# Altium PCB Led.PcbDoc
Units mm, origin at the board's own origin, x right, y up, seen from the top; angles counter-clockwise.
Board outline 86 x 86 mm, 2 copper layers (Top Layer, Bottom Layer); 38 components, 41 nets, 90 pads, 0 vias.
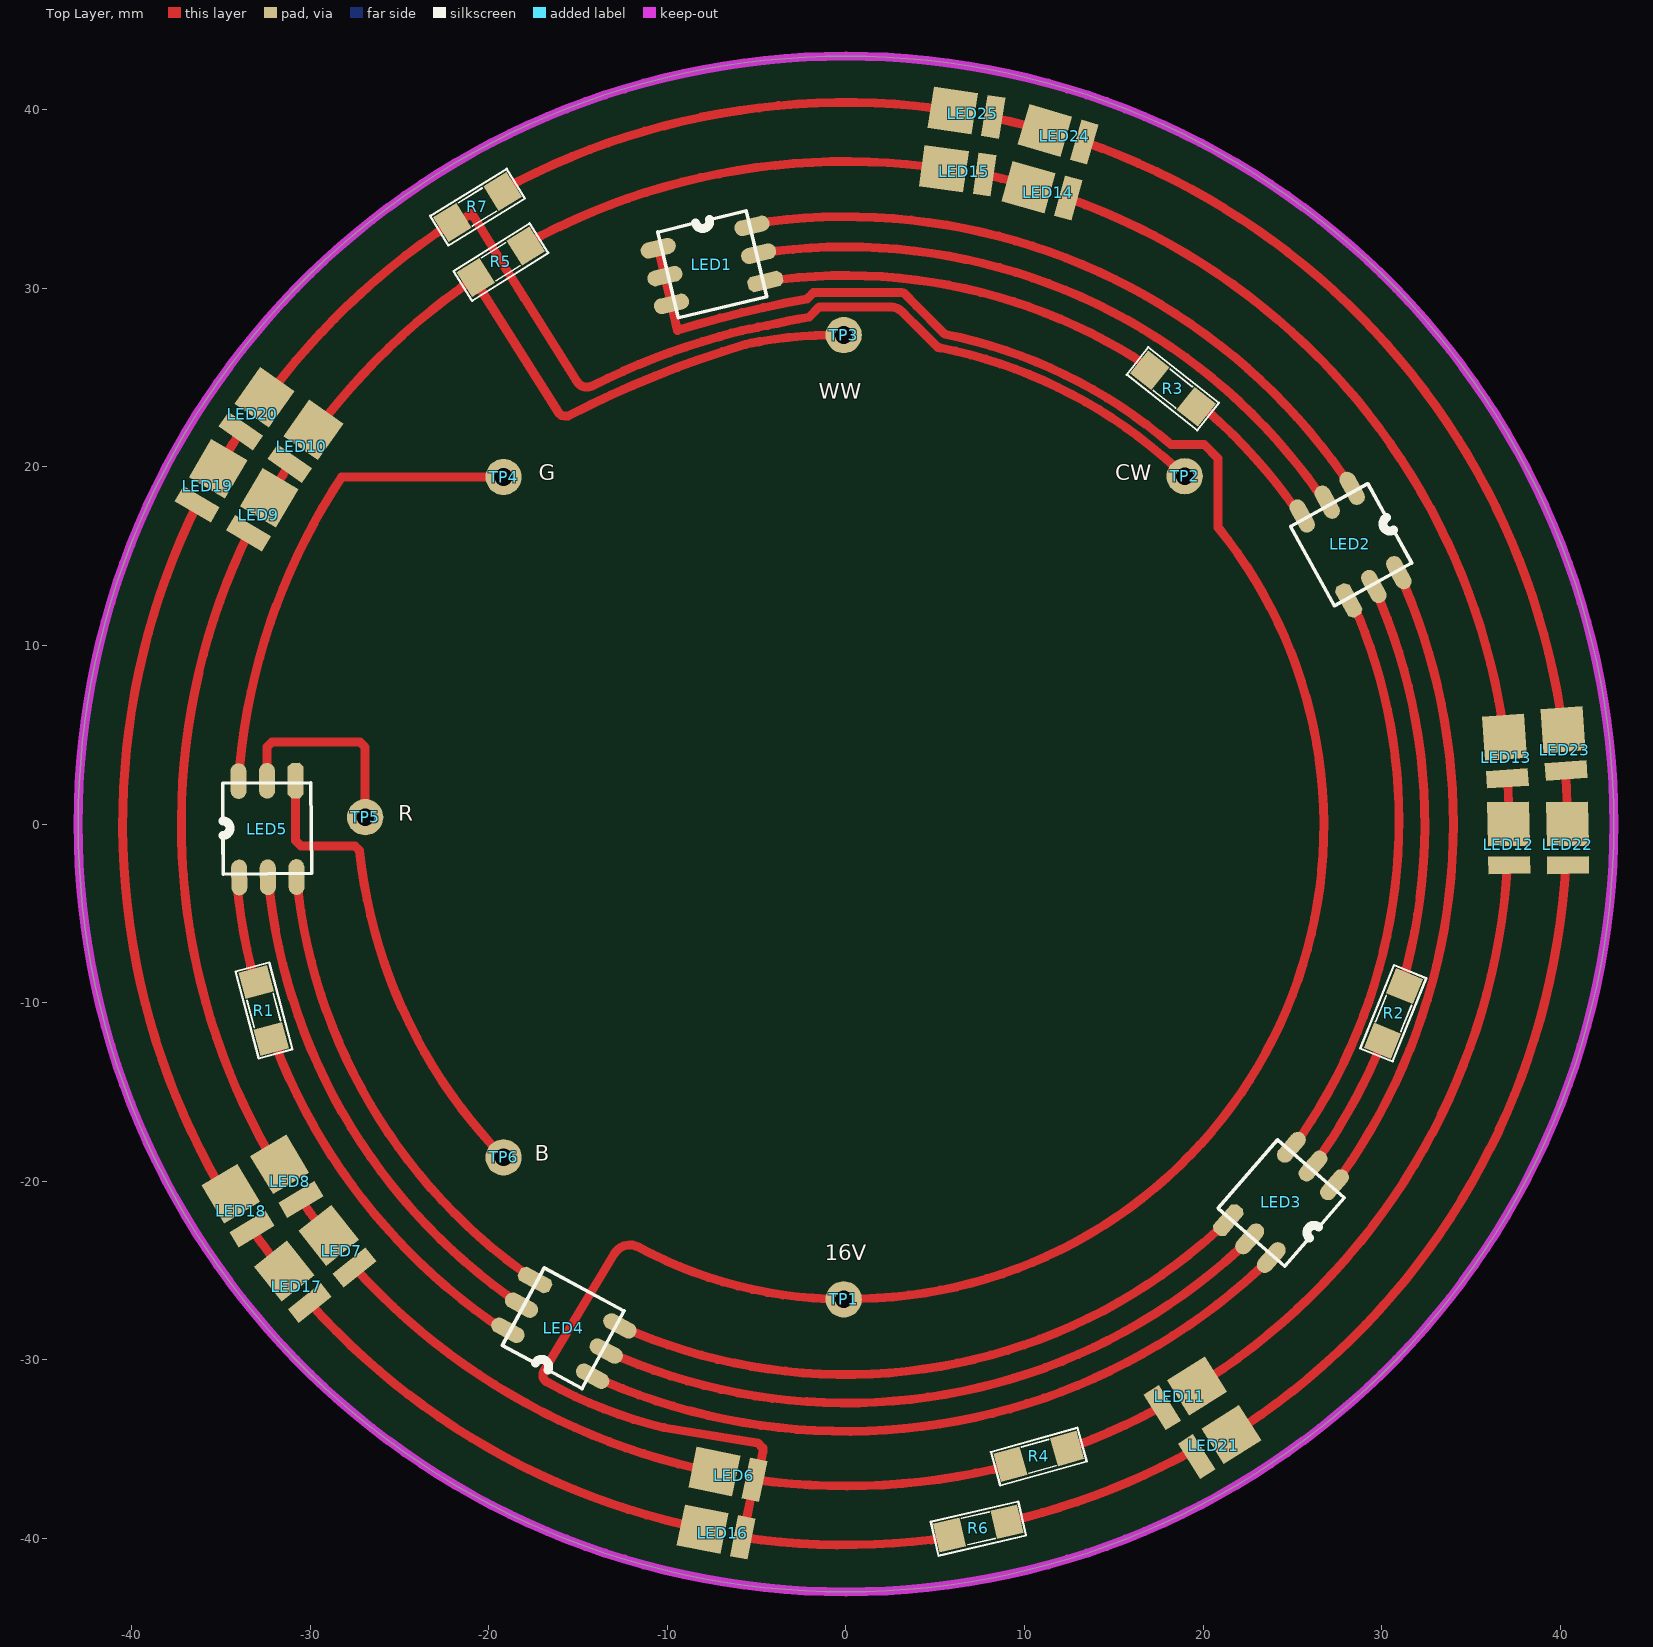
[diagram p0: Top Layer view]
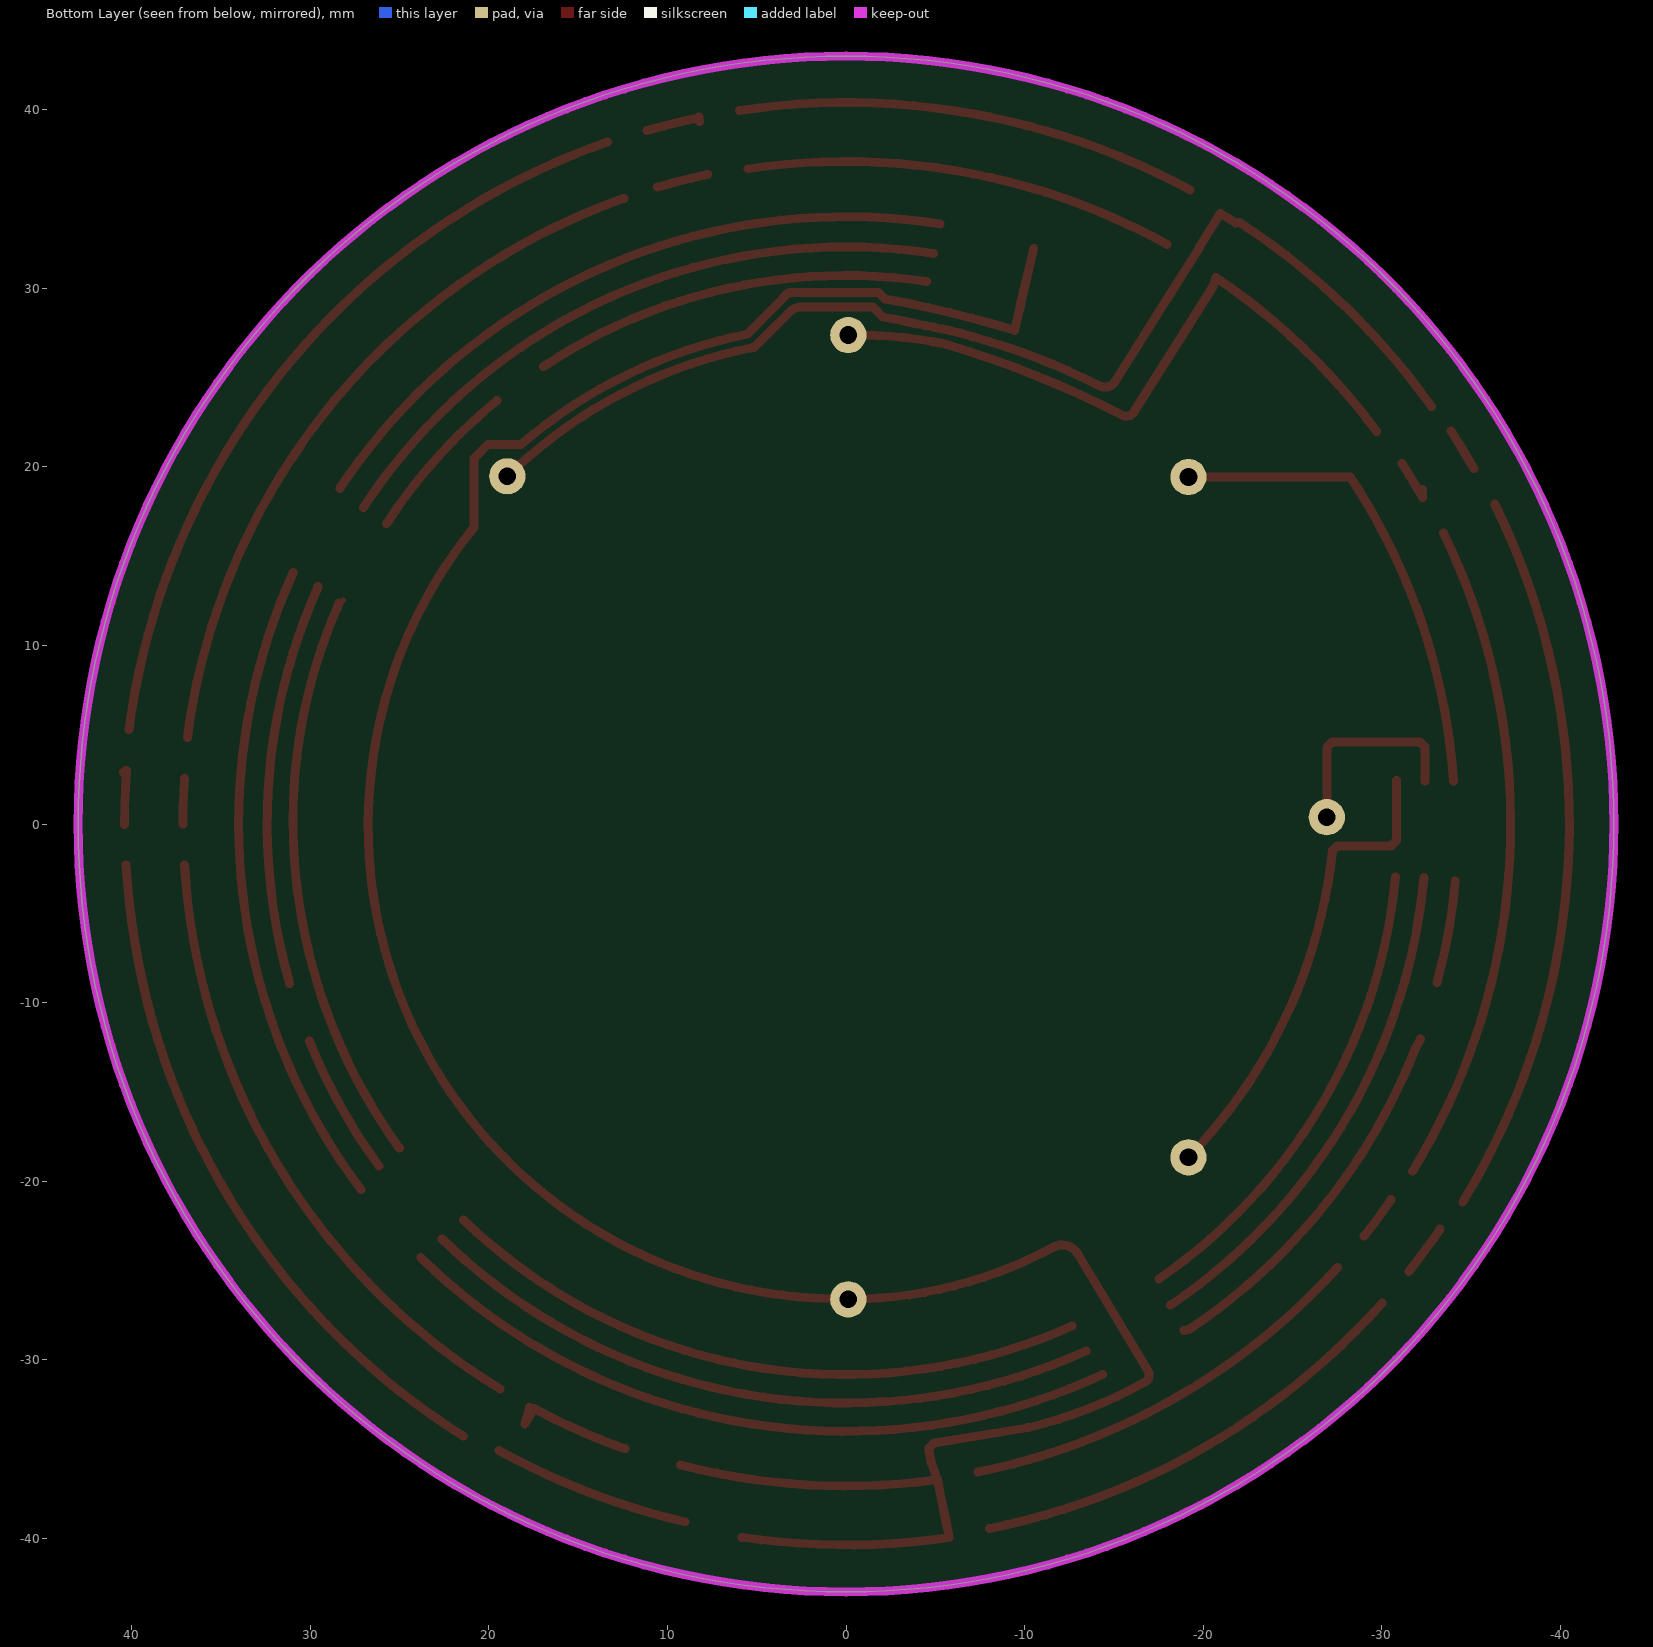
[diagram p1: Bottom Layer view, seen from below]
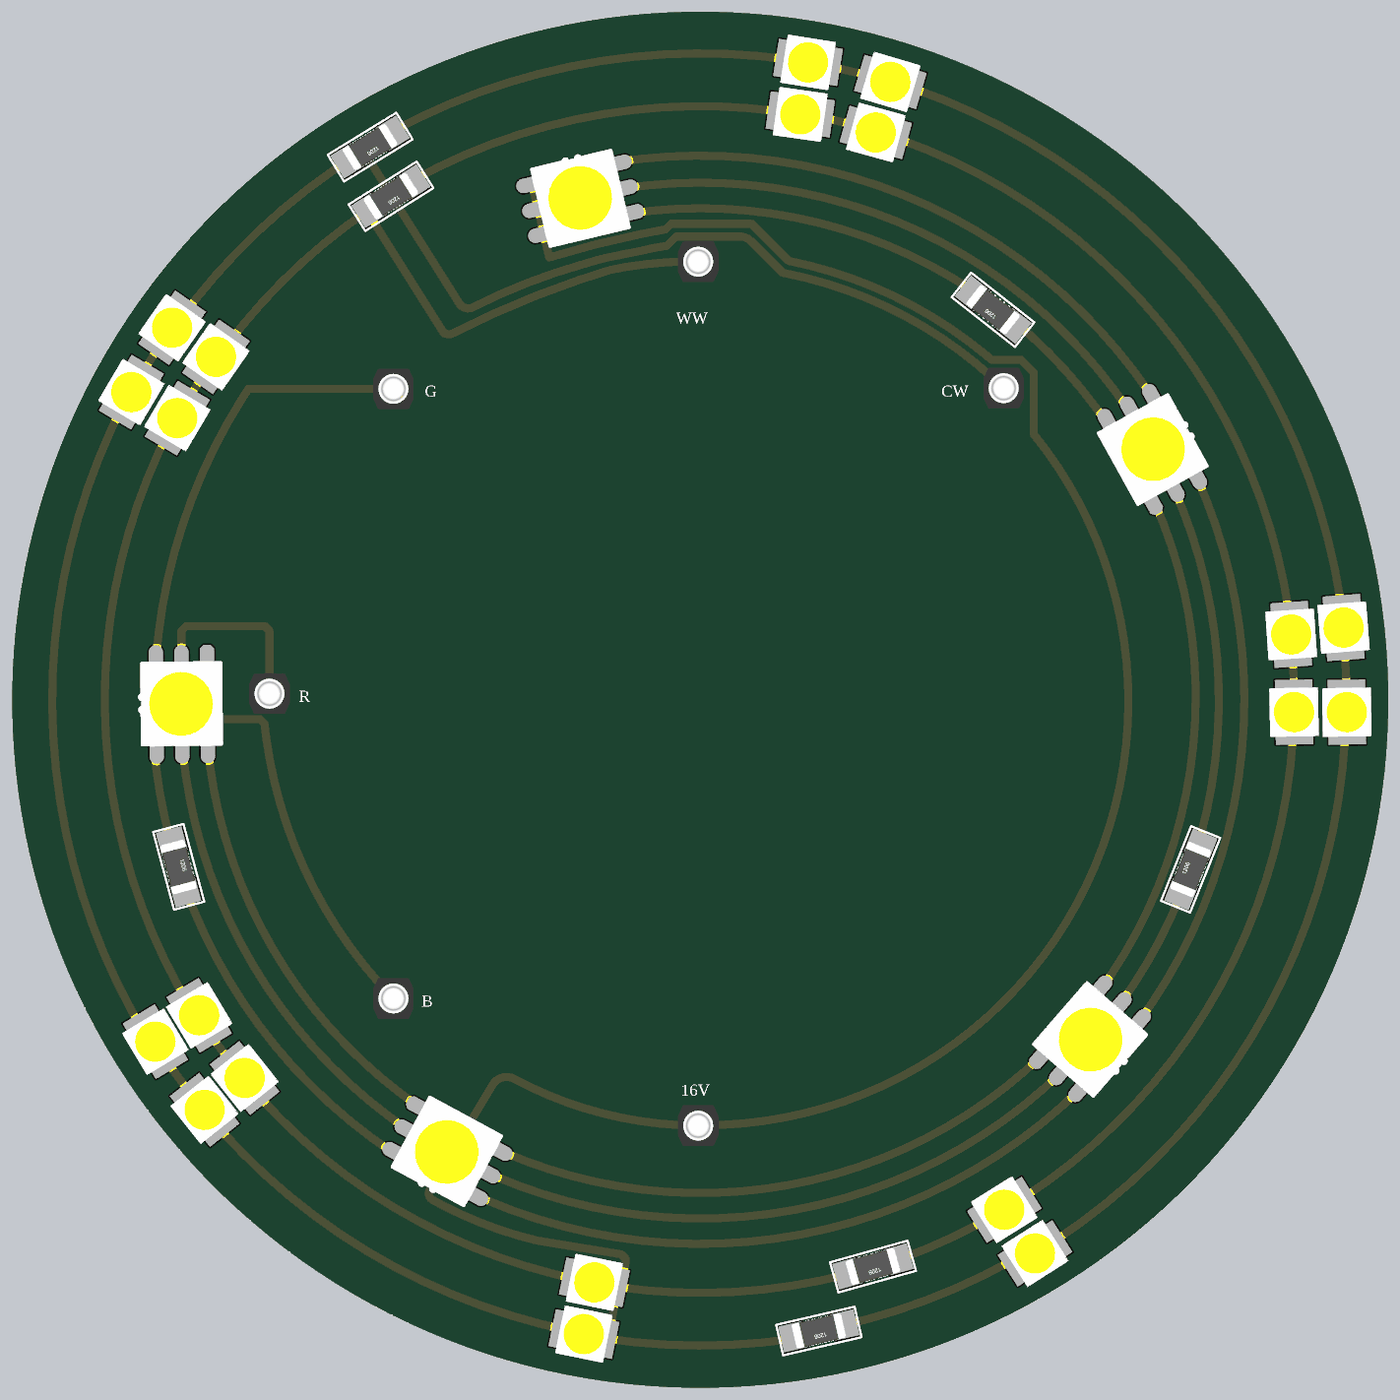
[diagram p2: 3D render of the assembled board from above, using the file's embedded part models]

## Layer stack, top to bottom
Top Solder: solder mask 0.0102, Solder Resist, Dk 3.5
Top Layer: signal copper 0.0356
Dielectric 1: dielectric 0.32, FR-4, Dk 4.8
Bottom Layer: signal copper 0.0356
Bottom Solder: solder mask 0.0102, Solder Resist, Dk 3.5

## Board outline
-43,0 ccw(c0,0) 0,-43 ccw(c0,0) 43,0 ccw(c0,0) 0,43 ccw(c0,0)

## Design rules (kind name [scope] priority, off if disabled: settings)
Clearance [All] p1: gap=0.3 ignorepadtopadclearanceinfootprint=FALSE
PolygonConnect [All] p1: connectstyle=Relief reliefconductorwidth=0.254 reliefentries=4 polygonreliefangle="90 Angle" airgapwidth=0.254
RoutingVias [All] p1: holewidth=0.711 width=1.27 viastyle="Through Hole" minholewidth=0.711 minwidth=1.27 maxholewidth=0.711 maxwidth=1.27
SolderMaskExpansion [All] p1: expansion=0.102 istentingtop=FALSE
Width [All] p1: maxlimit=0.5 minlimit=0.5 preferedwidth=0.5
30 further rules are at their usual default settings.

## Components (designator, comment, footprint, x,y, rotation, side; value= is the part's Value field where it differs from the comment)
LED1 "RGB 5050" "LED RGB 5050" -7.517,31.31 r193.44 top
LED2 "RGB 5050" "LED RGB 5050" 28.25,15.659 r119 top
LED3 "RGB 5050" "LED RGB 5050" 24.377,-21.191 r49.02 top
LED4 "RGB 5050" "LED RGB 5050" -15.799,-28.229 r331.57 top
LED5 "RGB 5050" "LED RGB 5050" -32.399,-0.283 r270.5 top
LED6 "3030" "LED 3030" -5.123,-36.716 r348.5 top value="LED 3 - 5 ly 2 Colour"
LED7 "3030" "LED 3030" -27.525,-24.833 r308.5 top value="LED 3 - 5 ly 2 Colour"
LED8 "3030" "LED 3030" -30.531,-21.028 r301 top value="LED 3 - 5 ly 2 Colour"
LED9 "3030" "LED 3030" -33.462,16.29 r239.38 top value="LED 3 - 5 ly 2 Colour"
LED10 "3030" "LED 3030" -31.139,20.182 r235.1 top value="LED 3 - 5 ly 2 Colour"
LED11 "3030" "LED 3030" 17.711,-32.684 r212.08 top value="LED 3 - 5 ly 2 Colour"
LED12 "3030" "LED 3030" 37.138,-2.3 r270.96 top value="LED 3 - 5 ly 2 Colour"
LED13 "3030" "LED 3030" 37.036,2.561 r273.85 top value="LED 3 - 5 ly 2 Colour"
LED14 "3030" "LED 3030" 12.442,35.047 r344.47 top value="LED 3 - 5 ly 2 Colour"
LED15 "3030" "LED 3030" 7.761,36.371 r351.97 top value="LED 3 - 5 ly 2 Colour"
LED16 "3030" "LED 3030" -5.781,-39.95 r348.5 top value="LED 3 - 5 ly 2 Colour"
LED17 "3030" "LED 3030" -30.029,-26.825 r308.5 top value="LED 3 - 5 ly 2 Colour"
LED18 "3030" "LED 3030" -33.274,-22.676 r301 top value="LED 3 - 5 ly 2 Colour"
LED19 "3030" "LED 3030" -36.33,17.913 r239.48 top value="LED 3 - 5 ly 2 Colour"
LED20 "3030" "LED 3030" -33.882,22.003 r235.14 top value="LED 3 - 5 ly 2 Colour"
LED21 "3030" "LED 3030" 19.635,-35.422 r212.44 top value="LED 3 - 5 ly 2 Colour"
LED22 "3030" "LED 3030" 40.433,-2.3 r270.82 top value="LED 3 - 5 ly 2 Colour"
LED23 "3030" "LED 3030" 40.321,2.992 r274.18 top value="LED 3 - 5 ly 2 Colour"
LED24 "3030" "LED 3030" 13.342,38.183 r343.54 top value="LED 3 - 5 ly 2 Colour"
LED25 "3030" "LED 3030" 8.243,39.598 r351.03 top value="LED 3 - 5 ly 2 Colour"
R1 "10R" SM-RES-1206 -33.035,-8.852 r285 top value="R1/4W - 1K"
R2 "51R" SM-RES-1206 30.041,-12.137 r68 top value="R1/4W - 1K"
R3 "1.8R" SM-RES-1206 19.605,23.364 r141.81 top value="R1/4W - 1K"
R4 "0R" SM-RES-1206 12.384,-34.972 r195.58 top value="R1/4W - 1K"
R5 "0.82R" SM-RES-1206 -17.938,32.361 r212.24 top value="R1/4W - 1K"
R6 "0R" SM-RES-1206 9.021,-39.072 r193 top value="R1/4W - 1K"
R7 "0.82R" SM-RES-1206 -19.229,35.416 r211.56 top value="R1/4W - 1K"
TP1 "1" TP -0.127,-26.619 r0 top
TP2 "1" TP 18.965,19.473 r0 top
TP3 "1" TP -0.127,27.381 r0 top
TP4 "1" TP -19.177,19.431 r0 top
TP5 "1" TP -26.924,0.381 r0 top
TP6 "1" TP -19.177,-18.669 r0 top

## Footprints (in the part's own frame and the unit in brackets; to place one, negate y for a bottom-side part, rotate by r counter-clockwise, add the part's x,y. Pads: shape width x height; smd on the part's side, far side on the other; paste and mask are expansions set on the pad)
"LED 3030" [mm]
  rect 1x2.35 smd: 1(0,0)
  rect 2.5x2.35 smd: 2(-2.3,0)
  body extent -3.05,-1.52 0,1.52, height 0.51
"LED RGB 5050" [mm] "LED RGB 5050 1.5W"
  oval 2x0.9 smd: 1(2.7,-1.6) 2(-2.7,-1.6) 3(2.7,0) 4(-2.7,0) 5(2.7,1.6)
  oct 2x0.9 smd: 6(-2.7,1.6)
  silkscreen extent -2.58,-2.49 2.5,2.45, body extent -2.67,-2.55 2.63,2.45, height 1.6
SM-RES-1206 [mil]
  rect 60x65 smd: 1(0,0) 2(130,0)
  silkscreen extent -34,-38 164,39, body extent 2,-31 128,32, height 40
TP [mil] "Connect 1"
  round 80 hole 39: TP1(0,0)
  body extent -50,-50 50,50, height 179

## Part data
LED1 LED2 LED3 LED4 LED5: library part "LED RGB 5050 1.5W"
LED6 LED7 LED8 LED9 LED10 LED11 LED12 LED13 LED14 LED15 LED16 LED17 LED18 LED19 LED20 LED21 LED22 LED23 LED24 LED25: library part "LED SMD"
R1 R2 R3 R4 R5 R6 R7: library part R, "Resistor 1/4W"
TP1 TP2 TP3 TP4 TP5 TP6: library part TP, "CONNECT 1"

## Nets (pads, with @x,y where several pads share a name; then routed paths per layer and width w, separated by ;. In a path a pad name is that pad's centre, name@x,y a point inside that pad or via, vN(x,y) a via of type N, cw(c..) or ccw(c..) an arc to the next point about the centre after c; other vN are vias at no path point)
15V: LED1.1 LED1.3 LED1.5 LED6.1 LED16.1 R4.2 R6.2 TP1.TP1 | length 168.2
  Top Layer w0.5: LED1.1 LED1.3 LED1.5 -9.792,29.121 -9.784,29.089 -9.778,29.064 -9.772,29.037 -9.562,28.16 -9.491,27.862 -9.474,27.793 -9.439,27.644 cw(c8.403,-30.282) -2.184,29.398 -2.073,29.509 -1.828,29.753 2.9,29.753 3.117,29.753 3.222,29.742 3.957,29.008 5.387,27.577 5.427,27.537 5.431,27.533 5.535,27.429 cw(c0,0) 18.205,21.25 20.05,21.25 20.841,20.459 20.841,16.602 cw(c0.258,-0.089) -0.04,-26.588 -0.123,-26.618 TP1.TP1 cw(c-0.01,-2.071) -11.63,-23.695 ccw(c-12.11,-24.58) -12.974,-24.063 -16.868,-30.555 -16.87,-30.558 -16.884,-30.582 -16.886,-30.586 -16.906,-30.619 ccw(c-16.512,-30.856) -16.737,-31.258 ccw(c-4.131,-8.547) -10.195,-33.804 -10.178,-33.806 -10.177,-33.807 -4.951,-34.659 -4.658,-34.952 -4.658,-35.175 -4.793,-35.839 LED6.1 ; R6.2@5.822,-39.944 cw(c0,0) LED16.1 -5.596,-39.043 -5.307,-37.622 LED6.1 ; R4.2@9.282,-35.891 cw(c0,0) LED6.1
NetLED1_2: LED1.2 LED2.1 | length 38.8
  Top Layer w0.5: LED1.2@-5.279,33.595 cw(c0,0) LED2.1
NetLED1_4: LED1.4 LED2.3 | length 36.9
  Top Layer w0.5: LED1.4@-4.892,31.946 cw(c0,0) LED2.3@27.023,17.727
NetLED1_6: LED1.6 R3.2 | length 22.5
  Top Layer w0.5: LED1.6 cw(c0,0) R3.2@16.953,25.614
NetLED2_2: LED2.2 LED3.1 | length 36.5
  Top Layer w0.5: LED3.1@27.159,-20.466 ccw(c0,0) 34.007,0 ccw(c0,0) LED2.2
NetLED2_4: LED2.4 R2.2 | length 22.8
  Top Layer w0.5: LED2.4 cw(c0,0) R2.2@31.157,-8.934
NetLED2_5: LED2.5 R3.1 | length 9.3
  Top Layer w0.5: R3.1@19.548,23.715 cw(c0.022,0) LED2.5@25.73,16.815
NetLED2_6: LED2.6 LED3.5 | length 32.4
  Top Layer w0.3: LED2.6 28.307,12.427 LED2.6@28.382,12.378
  Top Layer w0.5: LED3.5@25.007,-18.152 ccw(c-0.282,0.204) 30.966,0.203 ccw(c1.006,0.204) LED2.6@28.382,12.378
NetLED3_2: LED3.2 LED4.1 | length 41.2
  Top Layer w0.5: LED4.1@-14.372,-30.822 ccw(c0,0) LED3.2
NetLED3_3: LED3.3 R2.1 | length 8
  Top Layer w0.5: LED3.3 ccw(c0,0) R2.1@30.052,-12.142
NetLED3_4: LED3.4 LED4.3 | length 38.9
  Top Layer w0.5: LED4.3@-13.446,-29.505 ccw(c0,0) LED3.4@22.614,-23.237
NetLED3_6: LED3.6 LED4.5 | length 36.7
  Top Layer w0.5: LED4.5 ccw(c0,0) LED3.6@21.415,-22.176
NetLED4_2: LED4.2 R1.2 | length 21.4
  Top Layer w0.5: R1.2 -31.914,-12.5 -31.911,-12.511 ccw(c-0.417,-0.202) -19.198,-28.32 -19.077,-28.334 LED4.2
NetLED4_4: LED4.4 LED5.3 | length 28.8
  Top Layer w0.5: LED5.3@-32.363,-2.982 ccw(c0,0) LED4.4
NetLED4_6: LED4.6 LED5.5 | length 27
  Top Layer w0.5: LED5.5 ccw(c0,0) LED4.6@-17.512,-25.48
NetLED5_1: LED5.1 R1.1 | length 6
  Top Layer w0.1: LED5.1@-34.117,-3.199 -34.096,-3.169 LED5.1
  Top Layer w0.5: LED5.1@-34.117,-3.199 ccw(c-2.049,-0.37) R1.1@-33.099,-8.869
NetLED6_2: LED6.2 LED7.1 | length 23.6
  Top Layer w0.5: LED7.1 ccw(c-0.1,-0.05) LED6.2@-7.383,-36.289
NetLED7_2: LED7.2 LED8.1 | length 2.6
  Top Layer w0.5: LED8.1 ccw(c-0.1,-0.05) LED7.2@-29.011,-23.077
NetLED8_2: LED8.2 LED9.1 | length 37.3
  Top Layer w0.5: LED9.1 ccw(c-0.025,0) LED8.2@-31.731,-19.445
NetLED9_2: LED9.2 LED10.1 | length 2.7
  Top Layer w0.5: LED9.2@-32.296,18.272 cw(c0,0) LED10.1 ; LED9.2 LED9.2@-32.285,18.747
NetLED11_1: LED11.1 R4.1 | length 7.5
  Top Layer w0.5: R4.1 12.871,-34.81 ccw(c-0.116,0.086) 17.453,-32.742 17.991,-33.601 LED11.1
NetLED11_2: LED11.2 LED12.1 | length 35.6
  Top Layer w0.5: LED11.2@19.385,-31.633 ccw(c0,0.025) LED12.1@37.049,-2.294
NetLED12_2: LED12.2 LED13.1 | length 2.6
  Top Layer w0.5: LED13.1 cw(c0,0) LED12.2@37.125,0
NetLED13_2: LED13.2 LED14.1 | length 40.9
  Top Layer w0.5: LED14.1@12.439,35.037 cw(c0,-0.025) LED13.2
NetLED14_2: LED14.2 LED15.1 | length 2.9
  Top Layer w0.5: LED15.1 cw(c0,0) LED14.2@10.563,35.658
NetLED15_2: LED15.2 R5.1 | length 24.3
  Top Layer w0.5: R5.1@-17.986,32.448 cw(c0,0) LED15.2
NetLED16_2: LED16.2 LED17.1 | length 25.8
  Top Layer w0.5: LED17.1 ccw(c0,0) LED16.2@-8.028,-39.457
NetLED17_2: LED17.2 LED18.1 | length 3
  Top Layer w0.5: LED18.1 ccw(c0,0) LED17.2@-31.512,-25.066
NetLED18_2: LED18.2 LED19.1 | length 40.8
  Top Layer w0.5: LED19.1 ccw(c0.025,0) LED18.2@-34.538,-21.165
NetLED19_2: LED19.2 LED20.1 | length 2.5
  Top Layer w0.5: LED19.2 cw(c0.05,-0.025) LED20.1
NetLED21_1: LED21.1 R6.1 | length 11.2
  Top Layer w0.5: R6.1 ccw(c0,0) LED21.1@19.441,-35.072
NetLED21_2: LED21.2 LED22.1 | length 38.6
  Top Layer w0.5: LED21.2@21.423,-34.285 ccw(c-0.075,-0.025) LED22.1@40.308,-2.293
NetLED22_2: LED22.2 LED23.1 | length 3.2
  Top Layer w0.5: LED23.1@40.287,2.99 cw(c-0.025,-0.025) LED22.2@40.4,-0.025 ; LED23.1 LED23.1@40.464,2.883
NetLED23_2: LED23.2 LED24.1 | length 44.7
  Top Layer w0.5: LED24.1@13.346,38.195 cw(c0,-0.05) LED23.2
NetLED24_2: LED24.2 LED25.1 | length 3.2
  Top Layer w0.5: LED25.1@8.211,39.345 LED25.1 ; LED25.1@8.234,39.552 cw(c0,0) LED24.2
NetLED25_2: LED25.2 R7.1 | length 26.1
  Top Layer w0.5: R7.1@-19.277,35.504 cw(c0,0) LED25.2
TRAN_B: LED5.6 TP6.TP1 | length 26.5
  Top Layer w0.5: LED5.6 -30.822,-0.932 -30.529,-1.225 -27.507,-1.225 -27.36,-1.371 -27.236,-1.496 ccw(c1.601,1.559) TP6.TP1
TRAN_G: LED5.2 TP4.TP1 | length 27.2
  Top Layer w0.5: LED5.2 cw(c1.277,-0.088) -28.24,19.431 TP4.TP1
TRAN_R: LED5.4 TP5.TP1 | length 11.6
  Top Layer w0.5: LED5.4 -32.427,2.422 -32.427,4.307 -32.134,4.6 -27.225,4.6 -26.924,4.299 TP5.TP1
TRAN_W: LED20.2 R7.2 TP2.TP1 | length 65.2
  Top Layer w0.5: LED20.2@-32.781,23.382 cw(c0,-0.025) R7.2 -21.982,33.682 -21.812,33.663 -21.389,33.923 -20.968,34.181 -20.627,33.641 -20.091,32.791 -19.803,32.334 -19.803,32.291 -18.332,29.959 -18.002,29.435 -17.999,29.431 -15.056,24.764 ccw(c-14.507,25.107) -14.214,24.53 -14.213,24.53 cw(c3.028,-9.458) -7.132,27.274 cw(c-4.643,19.619) -7.023,27.308 cw(c-2.336,12.523) -5.814,27.639 cw(c-5.633,26.859) -5.791,27.643 cw(c-0.261,0.535) -4.993,27.794 ; -4.994,27.802 cw(c-4.8,27.026) -4.968,27.808 -4.965,27.811 cw(c2.443,-7.729) -4.919,27.821 cw(c2.443,-7.729) -3.858,28.024 cw(c0.353,11.455) -2.072,28.378 -1.497,28.953 2.569,28.953 cw(c2.478,28) 3.157,28.676 3.305,28.528 4.149,27.684 4.994,26.839 5.142,26.691 cw(c0,0) 5.29,26.662 cw(c0,0) TP2.TP1
TRAN_Y: LED10.2 R5.2 TP3.TP1 | length 38.3
  Top Layer w0.5: LED10.2@-29.711,21.985 cw(c0,0) R5.2 -20.544,30.097 -20.526,30.048 -16.103,23.036 -15.943,22.877 -15.743,22.85 -15.726,22.848 -15.693,22.848 -15.572,22.848 cw(c11.427,-29.731) -5.633,26.859 cw(c-0.261,0.535) -5.61,26.864 cw(c-0.261,0.535) -4.957,26.988 ccw(c-5.094,27.776) -4.894,27.002 cw(c1.967,0.187) -4.8,27.026 cw(c-2.336,12.523) -4.78,27.029 ; -4.779,27.029 cw(c-0.264,-0.149) -0.163,27.402 TP3.TP1

## Keep-outs
Keep-Out Layer:
  circle w0.5: c0,0 r43

## Silkscreen, mask and mechanical layers (free items; w line width, h text height)
Top Overlay:
  text "WW" at -1.514,23.516 h1.5
  text "G" at -17.218,18.944 h1.5
  text "CW" at 15.072,18.944 h1.5
  text "R" at -25.082,-0.127 h1.5
  text "B" at -17.42,-19.177 h1.5
  text "16V" at -1.203,-24.744 h1.5